# EAGLE board SensX3P (EAGLE 8.1.1)
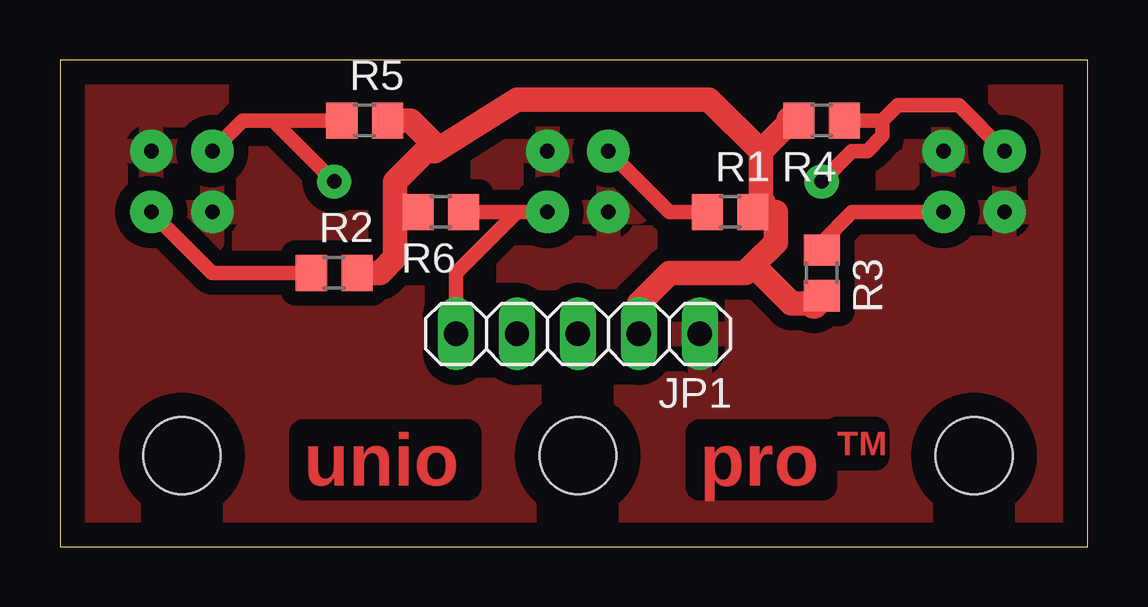
[diagram p0: board, top side]
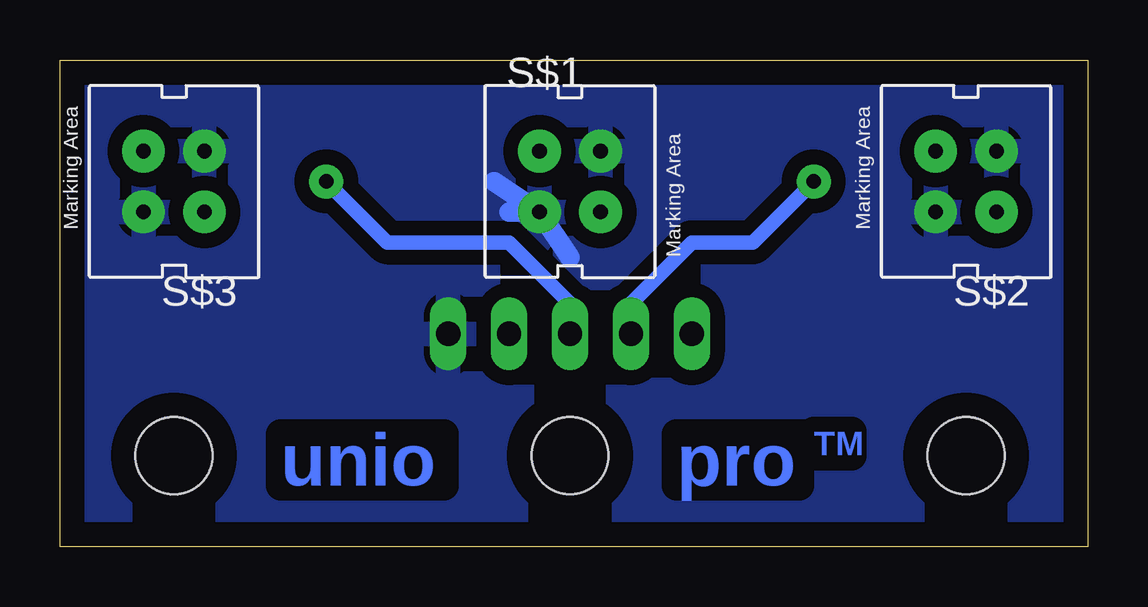
[diagram p1: board, bottom side, seen from below]

Size 42.85 x 20.31 mm. Coordinates in mm from the lower left corner, seen from the top.
Outline: 0,0 42.85,0 42.85,20.31 0,20.31 0,0
Copper layers (1*16): Top 0.035mm / dielectric 1.5mm / Bottom 0.035mm
Design rules "default": minimum track width 10mil, minimum drill 24mil, track to track 8mil, track to pad 8mil, pad to pad 8mil, via to via 8mil, smd to smd 8mil, copper to edge 40mil, drill to drill 8mil, minimum pad ring 10mil, minimum via ring 8mil, stop-mask expansion 4mil, vias tented up to drill 0mil, thermal gap 10mil
Holes 3.2 mm at 5.08,3.81 21.59,3.81 38.1,3.81

## Footprints (pad centres in the part's own frame; a part is rotated, then mirrored left to right if it is on the bottom)
1X05 = drill 1.016 long: 1 -5.08,0; 2 -2.54,0; 3 0,0; 4 2.54,0; 5 5.08,0
R0805 = smd 1.3 x 1.5: 1 -0.95,0; 2 0.95,0
4 = drill 0.61 pad 1.778: A -1.27,1.27; C 1.27,-1.27; E 1.27,1.27; K -1.27,-1.27

## Placement (x,y rotation side)
JP1  [1X05]  21.59,8.89 180 top
R1  200  [R0805]  27.94,13.97 0 top
R2  200  [R0805]  11.43,11.43 0 top
R3  200  [R0805]  31.75,11.43 270 top
R4  20k  [R0805]  31.75,17.78 180 top
R5  20k  [R0805]  12.7,17.78 0 top
R6  20k  [R0805]  15.88,13.97 180 top
S$1  CNY70  [4]  21.59,15.24 0 bottom
S$2  CNY70  [4]  5.08,15.24 180 bottom
S$3  CNY70  [4]  38.1,15.24 180 bottom

## Library data of the parts
JP1 = pinhead
R1-R6 = resistor
S$1-S$3 = cny70

## Nets
GND: JP1.1 S$1.E S$1.K S$2.E S$2.K S$3.E S$3.K
N$1: JP1.5 R6.1 S$1.C
N$2: JP1.4 R5.1 S$2.C
N$3: JP1.3 R4.1 S$3.C
N$8: R2.1 S$2.A
N$9: R1.1 S$1.A
N$11: R3.1 S$3.A
VCC: JP1.2 R1.2 R2.2 R3.2 R4.2 R5.2 R6.2

## Tracks (layer width: path | path; a pad name or v marks a point on that pad's centre or on a via)
GND
  Bottom 0.813: 24.13,13.97 S$1.K | S$1.K 21.59,12.06 | S$1.K 24.77,15.24
  pour Bottom (isolate 0.61): 0,20.32 43.18,20.32 43.18,0 0,0
  pour Top (isolate 0.61): 0,20.32 43.18,20.32 43.18,0 0,0
N$1
  Top 0.61: JP1.5 16.51,11.43 19.05,13.97 | 19.05,13.97 R6.1 | 19.05,13.97 S$1.C
N$2  (via drill 0.6 pad 1.42)
  Top 0.61: S$2.C 7.62,17.78 8.89,17.78 | v11.43,15.24 8.89,17.78 | 8.89,17.78 R5.1
  Bottom 0.61: JP1.4 19.05,10.16 16.51,12.7 13.97,12.7 v11.43,15.24
N$3  (via drill 0.6 pad 1.42)
  Top 0.61: S$3.C 37.47,18.41 34.92,18.41 34.29,17.78 | 34.29,17.78 34.29,17.14 33.66,16.51 33.02,16.51 v31.75,15.24 | 34.29,17.78 R4.1
  Bottom 0.61: v31.75,15.24 29.21,12.7 24.13,12.7 21.59,10.16 JP1.3
N$8
  Top 0.61: R2.1 6.35,11.43 S$2.A
N$9
  Top 0.61: R1.1 25.4,13.97 S$1.A
N$11
  Top 0.61: R3.1 31.75,12.7 33.02,13.97 S$3.A
VCC
  Top 1.016: 31.43,10.16 30.48,10.16 28.89,11.75 | 29.21,14.29 29.21,16.51 | 29.21,16.51 30.48,17.78 | 29.21,16.51 27.06,18.66 19.05,18.66 15.63,16.51 | JP1.2 24.13,10.16 25.4,11.43 28.57,11.43 28.89,11.75 | 15.63,16.51 15.63,16.75 14.61,17.78 R5.2 | 15.63,16.51 15.24,16.51 13.97,15.24 13.97,13.97 | 13.97,13.97 R6.2 | 13.97,13.97 13.97,12.06 13.34,11.43 R2.2 | 28.89,11.75 29.84,12.7 29.84,13.97 R1.2
  Top 1.27: R6.2 14.82,13.97 | R3.2 31.43,10.16 | R1.2 29.21,14.29 | 30.48,17.78 R4.2

## Text on the board
Top: TM | unio | pro
Bottom: TM | pro | unio